# Altium PCB bai2.PcbDoc
Units mm, origin at the board's own origin, x right, y up, seen from the top; angles counter-clockwise.
Board outline 200.79 x 152.02 mm, 2 copper layers (Top Layer, Bottom Layer); 9 components, 3 nets, 21 pads, 0 vias.
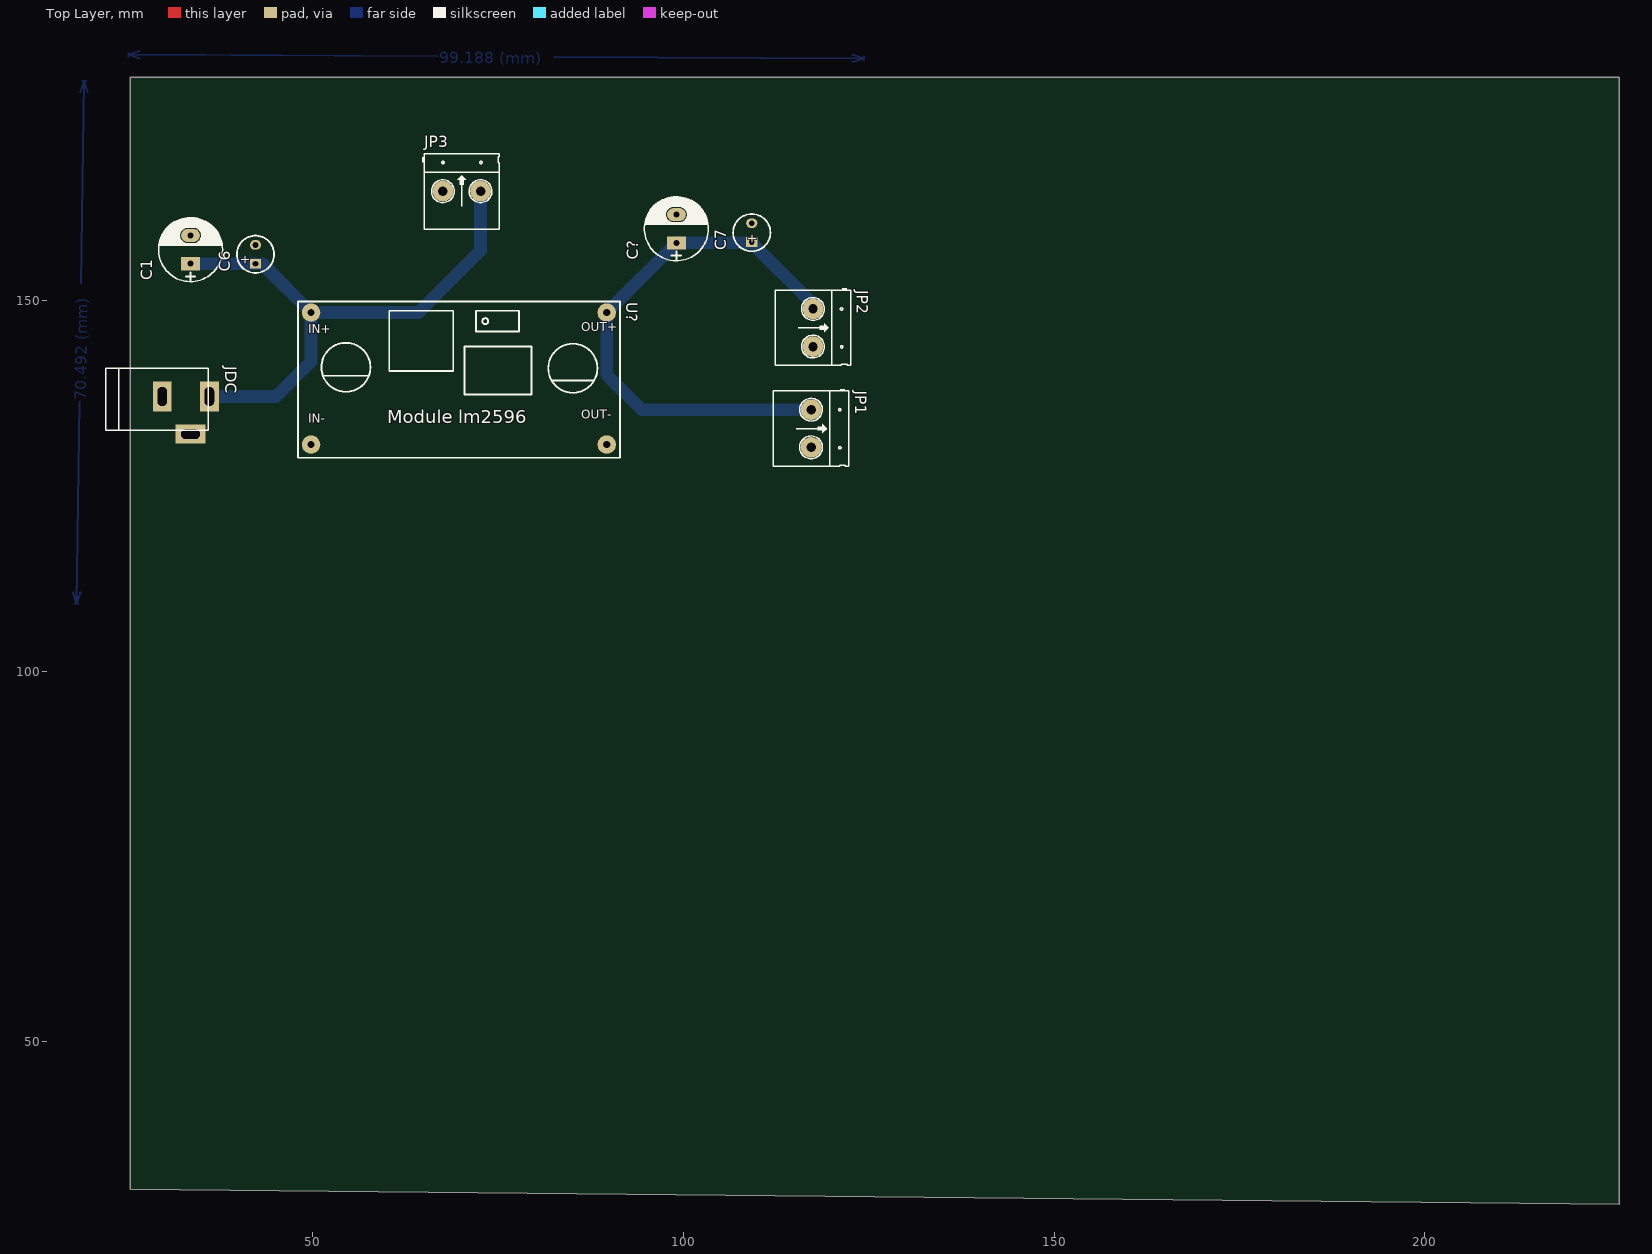
[diagram p0: Top Layer view]
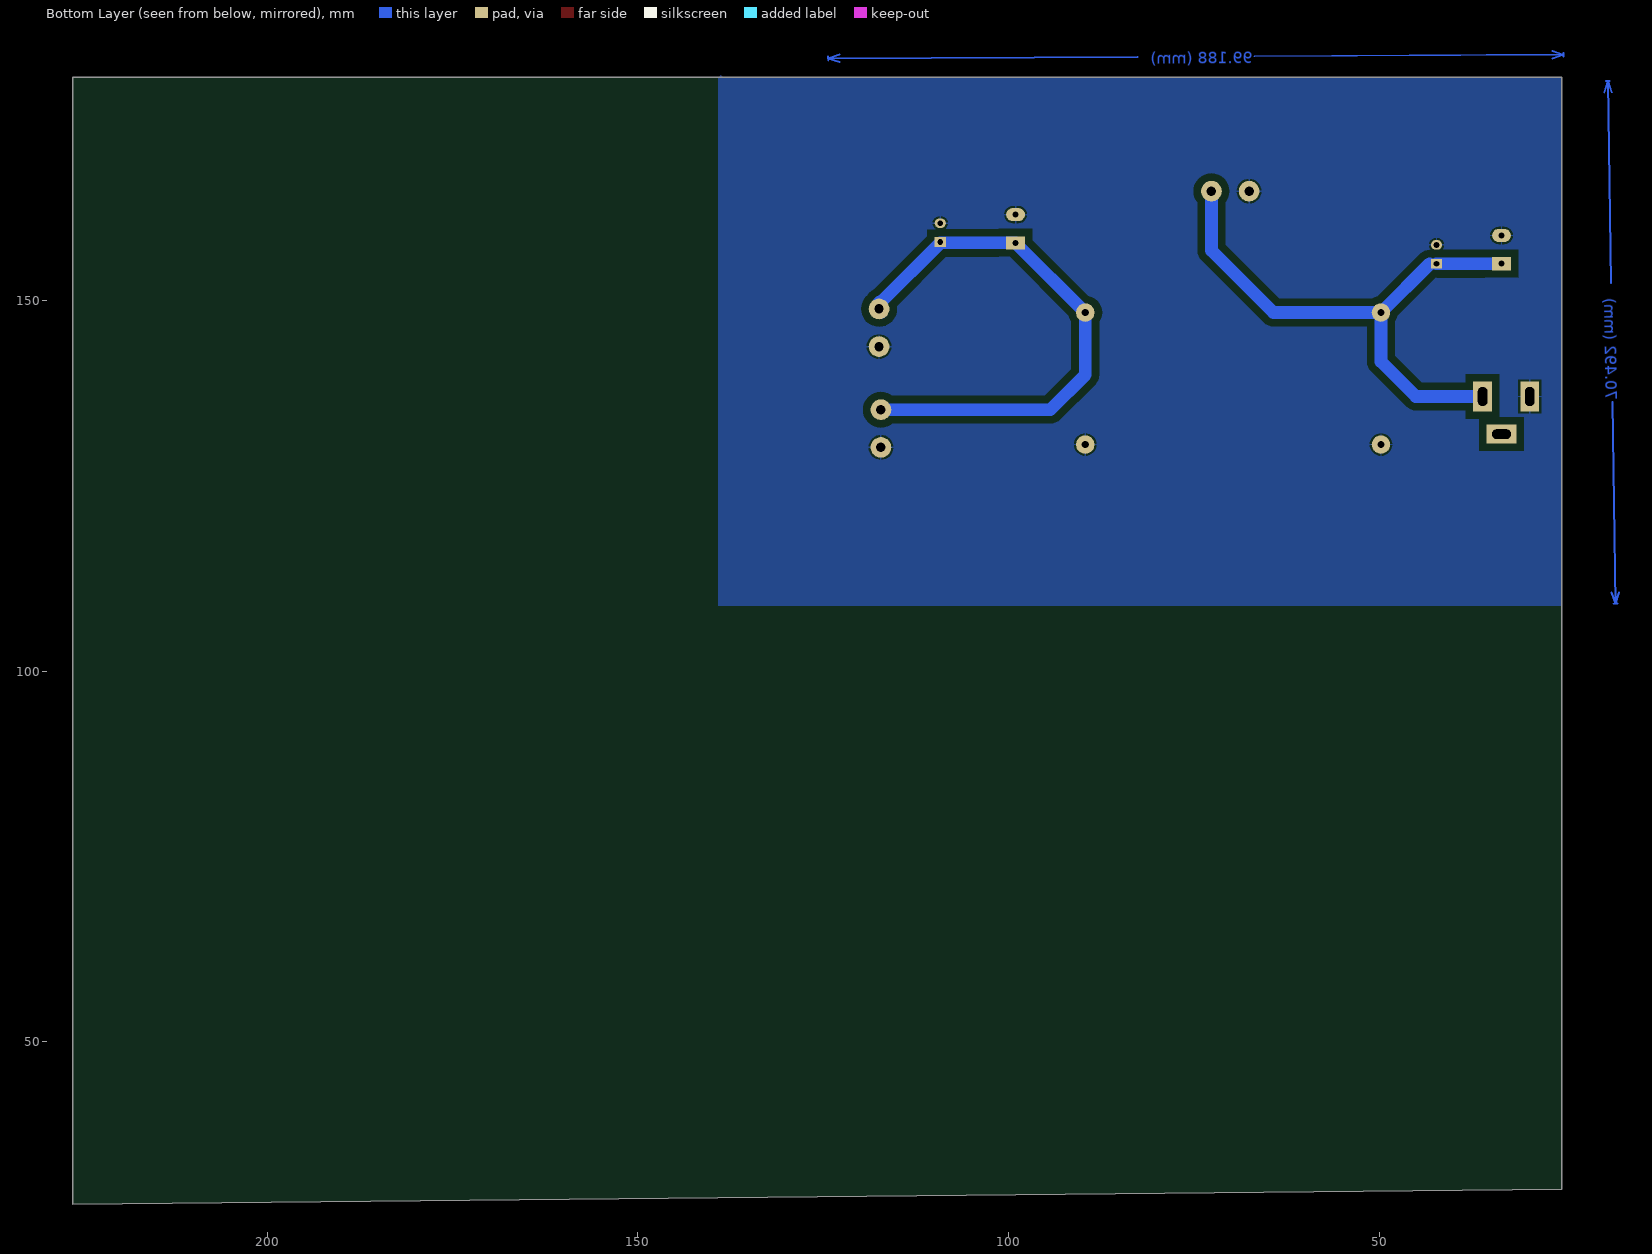
[diagram p1: Bottom Layer view, seen from below]

## Layer stack, top to bottom
Top Solder: solder mask 0.0102, Solder Resist, Dk 3.5
Top Layer: signal copper 0.0356
Dielectric 1: dielectric 0.32, FR-4, Dk 4.8
Bottom Layer: signal copper 0.0356
Bottom Solder: solder mask 0.0102, Solder Resist, Dk 3.5

## Board outline
25.4,30.099 226.187,28.067 226.187,180.086 25.4,180.086

## Design rules (kind name [scope] priority, off if disabled: settings)
Clearance [All] p1: gap=1
PolygonConnect [All] p1: connectstyle=Relief reliefconductorwidth=0.254 reliefentries=4 polygonreliefangle="90 Angle" airgapwidth=0.254
RoutingVias [All] p1: holewidth=0.711 width=1.27 viastyle="Through Hole" minholewidth=0.711 minwidth=1.27 maxholewidth=0.711 maxwidth=1.27
SolderMaskExpansion [All] p1: expansion=0.102
Width [All] p1: maxlimit=3 minlimit=1.3 preferedwidth=1.7
30 further rules are at their usual default settings.

## Classes and differential pairs
component class nguon_adapter: C1 C6 C7 C? JDC JP1 JP2 U?

## Components (designator, comment, footprint, x,y, rotation, side; value= is the part's Value field where it differs from the comment)
C1 "220uF/35V" CP1.5/3.4 33.528,154.94 r90 top
C6 "0.1uF" C5mm 42.291,156.21 r90 top
C7 "0.1uF" C5mm 109.22,159.131 r90 top
C? "220uF/35V" CP1.5/3.4 99.057,157.751 r90 top
JDC "Jac DC" DC-IN 32.893,134.493 r0 top
JP1 "Header 2_1" HED2 117.221,135.255 r270 top
JP2 "Header 2_1" HED2 117.475,148.844 r270 top
JP3 "Header 2_1" HED2 67.564,164.719 r0 top
U? "Lm2596" lm2596 49.784,130.556 r0 top

## Footprints (in the part's own frame and the unit in brackets; to place one, negate y for a bottom-side part, rotate by r counter-clockwise, add the part's x,y. Pads: shape width x height; smd on the part's side, far side on the other; paste and mask are expansions set on the pad)
C5mm [mm]
  rect 1.3x1.5 hole 0.8: 1(-1.27,0)
  oval 1.3x1.5 hole 0.8: 2(1.27,0)
  silkscreen extent -2.51,-2.51 2.51,2.51, body extent -2.5,-2.5 2.49,2.5, height 11.01
CP1.5/3.4 [mil] "Tu hoa 220->470uF,16V, 470uF/16V,25V"
  rect 70x100 hole 32: 1(0,0)
  oval 70x100 hole 32: 2(150,0)
  silkscreen extent -95,-170 245,170, body extent -85,-157 230,157, height 446
DC-IN [mil] "Jac DC input"
  rect 100x160 hole 50 slot 100 at 90 deg: 1(125,100) 2(-125,100)
  rect 160x100 hole 50 slot 100 at 0 deg: 3(25,-100)
  silkscreen extent -425,-80 120,250, body extent -410,-105 134,269, height 434
HED2 [mil] "Header 2, 2 pin, hight 300mil, Pin to Pin 200, Colour Green"
  round 110 hole 50: 1(0,0) 2(200,0)
  silkscreen extent -106,-201 300,200, body extent -106,-205 300,197, height 560
lm2596 [mm]
  round 2.5 hole 1: 1(0,17.8) 2(0,0) 3(39.878,17.8) 4(39.878,0)
  silkscreen extent -1.78,-1.78 41.66,19.3, body extent -1.81,-1.74 41.69,19.26, height 16.41

## Part data
C1 C?: library part CP3, "Cap 100uF/35V - 470uF/16V"
C6 C7: library part "Cap Pol 5mm", "Polarized Capacitor (Axial)"
JDC: library part DCIN, "Jac DC input"
JP1 JP2 JP3: "Header, 2-Pin"

## Nets (pads, with @x,y where several pads share a name; then routed paths per layer and width w, separated by ;. In a path a pad name is that pad's centre, name@x,y a point inside that pad or via, vN(x,y) a via of type N, cw(c..) or ccw(c..) an arc to the next point about the centre after c; other vN are vias at no path point)
GND: C1.2 C6.2 C7.2 C?.2 JDC.2 JP1.2 JP2.2 JP3.1 U?.2 U?.4
NetC7_1: C7.1 C?.1 JP1.1 JP2.1 U?.3 | length 74.3
  Bottom Layer w1.7: JP2.1@117.348,149.623 109.22,157.751 C?.1 U?.3 89.662,139.954 94.361,135.255 JP1.1 JP1.1@117.475,135.255
  Bottom Layer w2: JP2.1@117.348,148.463 JP2.1@117.348,149.623
VCC: C1.1 C6.1 JDC.1 JP3.2 U?.1 | length 76.2
  Bottom Layer w1.3: JDC.1 JDC.1@36.322,137.287 ; C6.1 43.2,154.94
  Bottom Layer w1.7: C1.1@33.274,154.94 C6.1 ; JDC.1 45.085,137.033 49.784,141.732 U?.1 ; 43.2,154.94 U?.1 ; JP3.2 72.644,156.718 64.282,148.356 U?.1
pads on no net: JDC.3
copper on no net: | length 152.7
  Bottom Layer w0.254: 17.675,110.624 18.161,109.093 ; 17.907,109.097 18.415,109.089 ; 18.553,136.312 18.161,109.093 ; 18.647,178.061 19.177,179.578 ; 18.691,110.61 18.161,109.093 ; 18.785,152.359 19.177,179.578 ; 18.923,179.582 19.431,179.574 ; 19.663,178.047 19.177,179.578 ; 25.145,182.88 25.147,183.388 ; 26.667,182.618 25.146,183.134 ; 26.673,183.634 25.146,183.134 ; 66.843,182.92 25.146,183.134 ; 82.636,182.84 124.333,182.626 ; 122.806,182.126 124.333,182.626 ; 122.812,183.142 124.333,182.626 ; 124.332,182.372 124.334,182.88

## Polygon pours and split planes (outlines as drawn)
GND on Bottom Layer "Top Layer-No Net" (solid, pour order 18): 25.527,179.832 25.527,108.966 25.146,108.585 25.4,108.839 139.192,108.839 139.192,179.959 138.811,180.34 138.557,180.086 25.527,180.086

## Other copper
Bottom Layer:
  text "99.188 (mm)" at 67.092,182.005 h1.52 r359.71
  text "70.492 (mm)" at 19.471,136.553 h1.52 r89.17

## Text inside footprints (layer, text, board x,y; h text height)
C6: Top Overlay "+" at 41.453,154.813 h1.2 r90
C7: Top Overlay "+" at 109.855,157.607 h1.2 r90
U?: Top Overlay "OUT-" at 86.233,133.604 h2; Top Overlay "OUT+" at 86.233,145.415 h2; Top Overlay "IN+" at 49.403,145.161 h2; Top Overlay "IN-" at 49.403,133.096 h2; Top Overlay "Module lm2596" at 60.071,132.842 h3